# Altium PCB FIT_PM_Dual_Range_AFE.PcbDoc (part 10 of 17)
Units mm, origin at the board's own origin, x right, y up, seen from the top; angles counter-clockwise.
Board outline 259 x 114 mm, 8 copper layers (Top Layer, Mid-Layer 1, Mid-Layer 2, Layer 1, Layer 2, Mid-Layer 3, Mid-Layer 4, Bottom Layer), stack 1.616 mm thick; 963 components, 806 nets, 4757 pads, 2208 vias.
Unrouted connection lines stored in the file: 682.
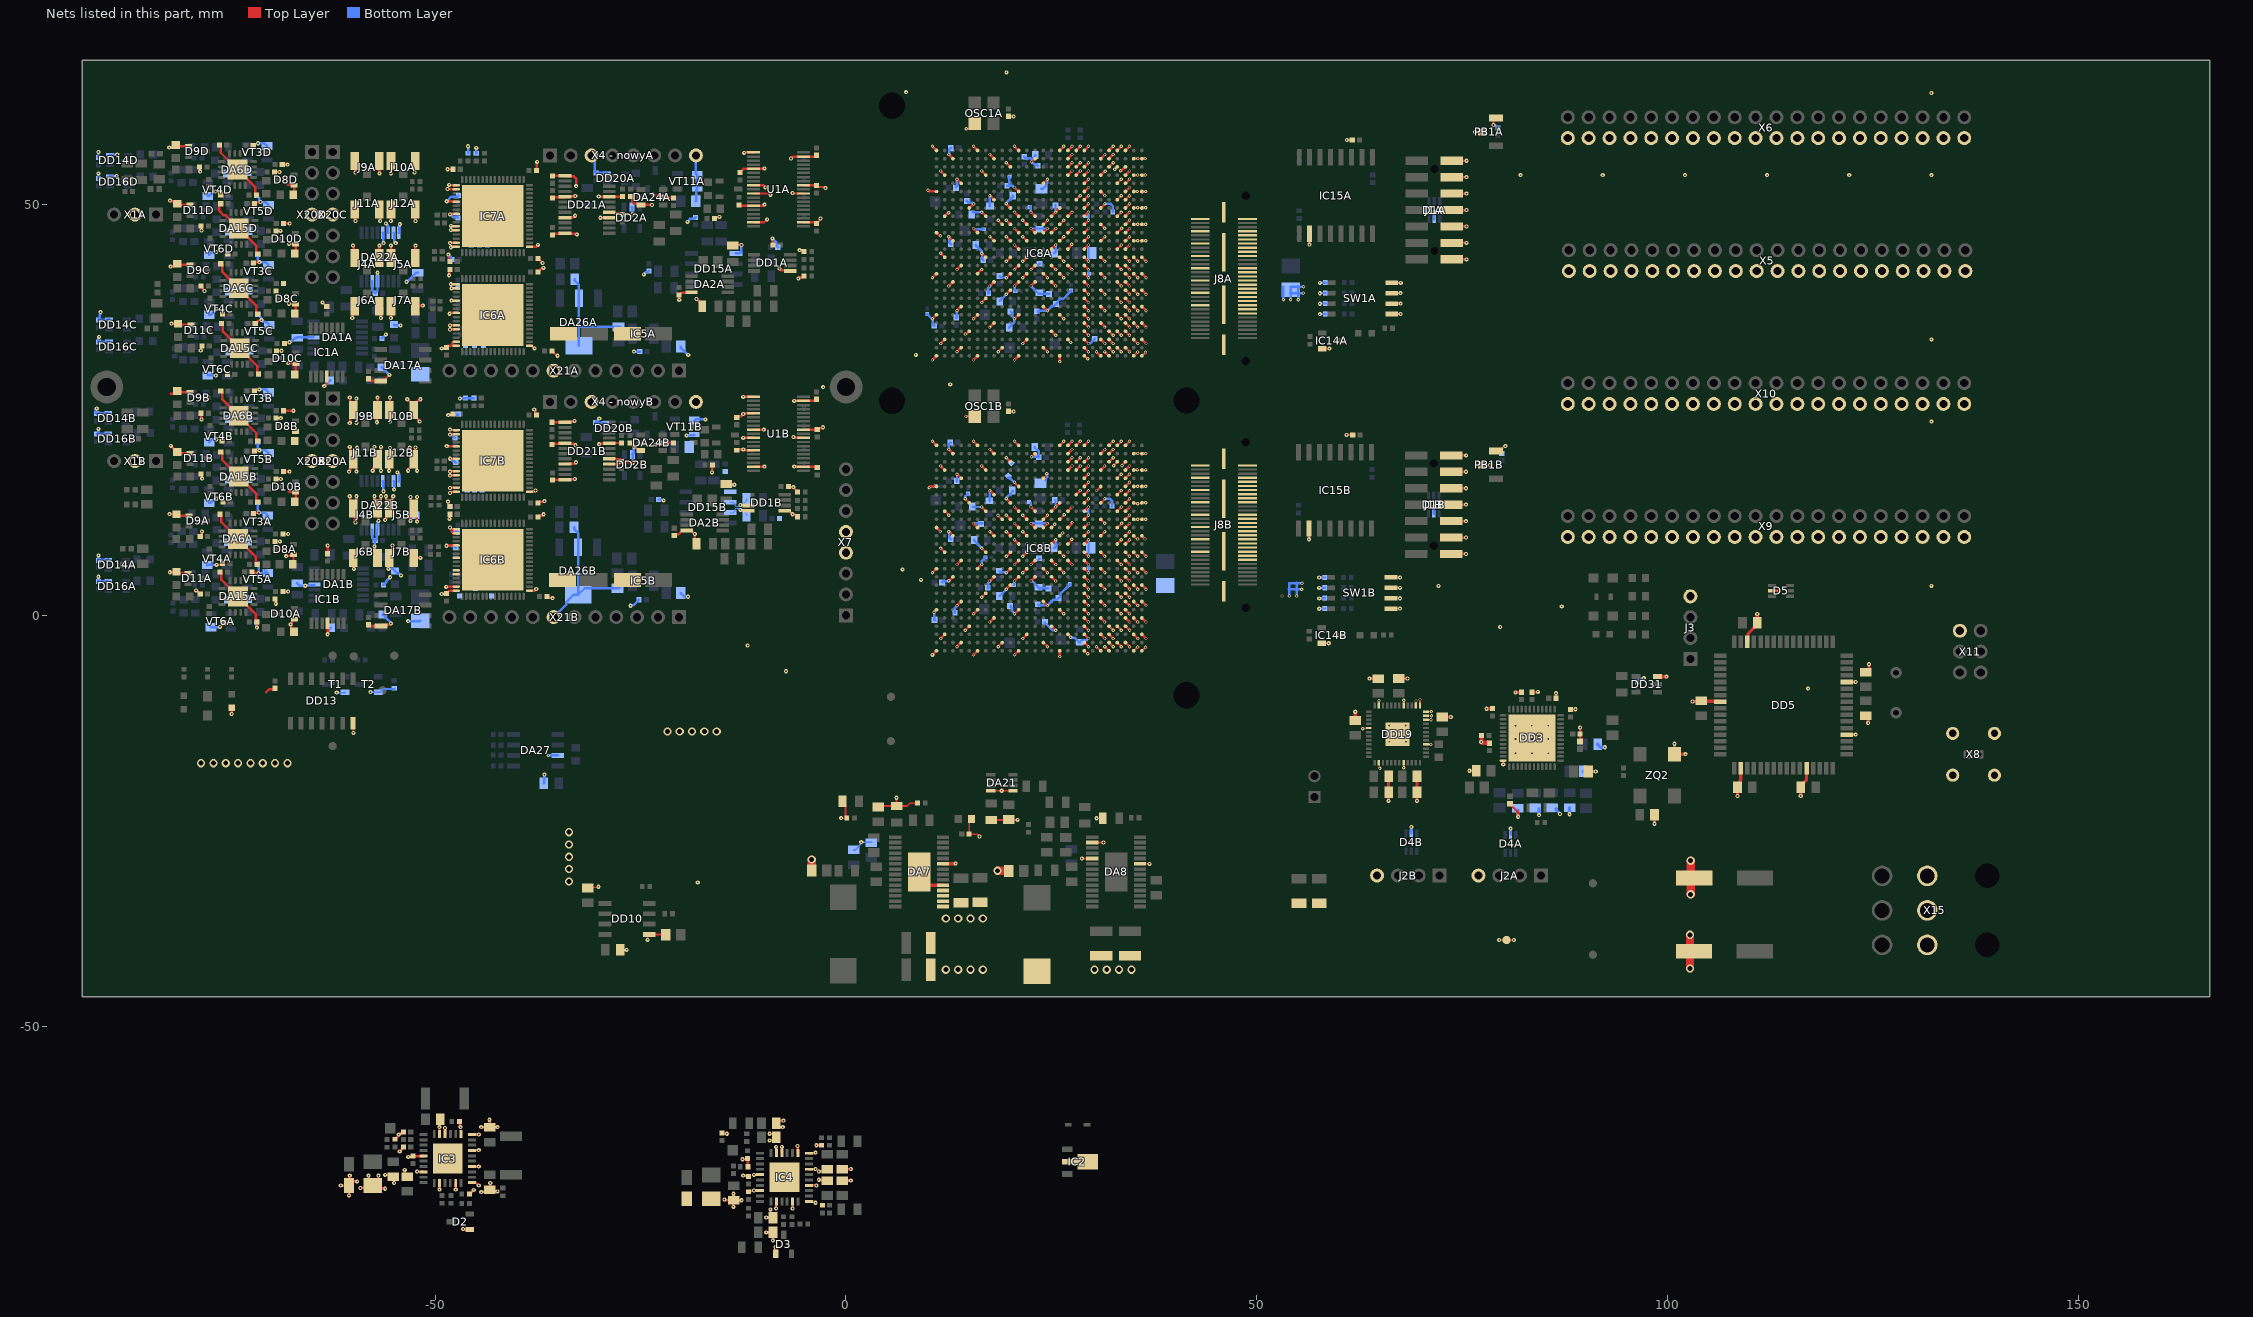
[diagram p12: the nets of this part, all layers, seen from the top]

## Via types
v1: diameter 0.5, hole 0.2, Top Layer to Bottom Layer, tented both sides, 1234 vias
v2: diameter 0.4, hole 0.2, Top Layer to Bottom Layer, tented both sides, 876 vias
v3: diameter 1, hole 0.6, Top Layer to Bottom Layer, tented both sides, 74 vias
v4: diameter 0.8, hole 0.4, Top Layer to Bottom Layer, tented both sides, 15 vias
v5: diameter 0.5, hole 0.2, Top Layer to Bottom Layer, 9 vias

## Nets (pads, with @x,y where several pads share a name; then routed paths per layer and width w, separated by ;. In a path a pad name is that pad's centre, name@x,y a point inside that pad or via, vN(x,y) a via of type N, cw(c..) or ccw(c..) an arc to the next point about the centre after c; other vN are vias at no path point) (continued)
Gate_STR1B_N: DD1B.3 DD15B.6 R117B.1 | length 3.9
  Top Layer w0.145: v1(-12.858,13.435) -11.913,13.435 DD1B.3@-11.858,13.381
  Bottom Layer w0.145: DD15B.6@-14.1,13.77 -13.705,13.77 -13.477,13.543 -13.477,13.342 -13.392,13.257 -13.1,13.257 -13.068,13.29 -12.945,13.29 -12.858,13.377 v1(-12.858,13.435) -12.762,13.435 -12.625,13.573 -12.502,13.573 -12.1,13.975 R117B.1@-12.1,14.2
Gate_STR1B_P: DD1B.4 DD15B.7 R10B.1 | length 3.9
  Top Layer w0.145: v1(-12.858,12.835) -11.963,12.835 DD1B.4@-11.858,12.731
  Bottom Layer w0.145: DD15B.7@-14.1,12.5 -13.705,12.5 -13.477,12.727 -13.477,12.928 -13.392,13.012 -13.1,13.012 -13.038,12.951 -12.974,12.951 v1(-12.858,12.835) -12.762,12.835 -12.655,12.728 -12.502,12.728 -12.1,12.325 R10B.1@-12.1,12.1
GND: "X4 - nowyA.3" "X4 - nowyA.8" "X4 - nowyB.3" "X4 - nowyB.8" B12.1 C2.2 C3A.1 C3B.1 C4.1 C8A.1 C8B.1 C9A.1 C9B.1 C10A.1 C10B.1 C11.1 C12.1 C13.2 C14.2 C15A.1 C15B.1 C16A.1 C16B.1 C17A.1 C17B.1 C18A.1 C18B.1 C19.1 C20.1 C21.1 C22.1 C23.1 C24.1 C25.1 C26.1 C29.1 C30.1 C31.1 C32.1 C33.1 C34.1 C35.1 C36A.1 C36B.1 C37A.1 C37B.1 C38A.1 C38B.1 C39A.1 C39B.1 C40.1 C41.1 C42.1 C43.1 C44.1 C45.2 C47.2 C48.1 C49.1 C50A.1 C50B.1 C54A.1 C54B.1 C55A.1 C55B.1 C56A.1 C56B.1 C58A.1 C58B.1 C59A.1 C59B.1 C60A.1 C60B.1 C61A.1 C61B.1 C62A.1 C62B.1 C63A.1 C63B.1 C63C.1 C63D.1 C64A.1 C64B.1 C64C.1 C64D.1 C65A.2 C65B.2 C67A.1 C67B.1 C68.1 C69.1 C70.1 C71.1 C72.1 C73.1 C74A.1 C74B.1 C74C.1 C74D.1 C75.1 C76.1 C77.1 C78A.1 C78B.1 C79A.1 C79B.1 C80A.1 C80B.1 C81A.1 C81B.1 C82A.1 C82B.1 C83A.1 C83B.1 C84A.1 C84B.1 C85A.1 C85B.1 C86.1 C87A.2 C87B.2 C88.1 C89A.1 C89B.1 C89C.1 C89D.1 C90A.1 C90B.1 C91A.1 C91B.1 C91C.1 C91D.1 C92A.1 C92B.1 C92C.1 C92D.1 C93A.1 C93B.1 C93C.1 C93D.1 C94A.1 C94B.1 C95A.1 C95B.1 C96A.1 C96B.1 C97A.1 C97B.1 C98A.1 C98B.1 C99A.1 C99B.1 C100A.1 C100B.1 C101A.1 C101B.1 C102A.1 C102B.1 C102C.1 C102D.1 C103A.2 C103B.2 C104A.1 C104B.1 C105.1 C106.1 C107.1 C108.1 C109.1 C110A.1 C110B.1 C111A.1 C111B.1 C112A.1 C112B.1 C113A.1 C113B.1 C114.1 C115.1 C116A.1 C116B.1 C117A.1 C117B.1 C118.1 C122.1 C124.1 C125A.1 C125B.1 C125C.1 C125D.1 C126A.1 C126B.1 C126C.1 C126D.1 C129A.1 C129B.1 C129C.1 C129D.1 C131A.1 C131B.1 C132.1 C133.2 C134.1 C135.1 C137.1 C138A.1 C138B.1 C138C.1 C138D.1 C140A.1 C140B.1 C140C.1 C140D.1 C142.1 C144A.1 C144B.1 C145.1 C146.1 C147A.1 C147B.1 C152A.1 C152B.1 C153A.1 C153B.1 C153C.1 C153D.1 C154A.1 C154B.1 C154C.1 C154D.1 C155A.1 C155B.1 C155C.1 C155D.1 C156A.1 C156B.1 C156C.1 C156D.1 C157A.1 C157B.1 C158A.1 C158B.1 C159A.1 C159B.1 C160A.1 C160B.1 C161A.1 C161B.1 C162A.1 C162B.1 C163A.2 C163B.2 C164A.1 C164B.1 C165A.1 C165B.1 C166A.1 C166B.1 C167A.1 C167B.1 C192.2 C193A.1 C193B.1 C194.1 C195.1 C196A.1 C196B.1 C197A.1 C197B.1 C198A.1 C198B.1 C199.1 C200A.1 C200B.1 C201.1 C208A.1 C208B.1 C211A.1 C211B.1 C212.1 C213.1 C214A.1 C214B.1 C215A.1 C215B.1 C216A.1 C216B.1 C217.1 C218.1 C219.1 C220.1 C221A.1 C221B.1 C222A.1 C222B.1 C223.1 C224.1 C225A.1 C225B.1 C226A.1 C226B.1 C227A.1 C227B.1 C228A.1 C228B.1 C229A.1 C229B.1 C230A.1 C230B.1 C231A.1 C231B.1 C232A.1 C232B.1 C255.1 C256.1 C257.1 C258.1 C259.1 C286A.1 C286B.1 C286C.1 C286D.1 C287A.1 C287B.1 C287C.1 C287D.1 C288A.1 C288B.1 C288C.1 C288D.1 C291A.1 C291B.1 C291C.1 C291D.1 C294A.1 C294B.1 C294C.1 C294D.1 C305A.1 C305B.1 C305C.1 C305D.1 C306A.1 C306B.1 C306C.1 C306D.1 C309A.1 C309B.1 C309C.1 C309D.1 C310A.1 C310B.1 C310C.1 C310D.1 C313A.1 C313B.1 C319A.1 C319B.1 C320A.1 C320B.1 D1A.2 D1B.2 D2.1 D3.1 D4A.2 D4B.2 D5.2 D8A.1 D8B.1 D8C.1 D8D.1 D9A.1 D9B.1 D9C.1 D9D.1 D10A.1 D10B.1 D10C.1 D10D.1 D11A.1 D11B.1 D11C.1 D11D.1 DA1A.11 DA1B.11 DA2A.8 DA2B.8 DA6A.17 DA6B.17 DA6C.17 DA6D.17 DA7.1 DA7.2 DA7.3 DA7.4 DA7.5 DA7.9 DA7.29 DA8.9 DA8.16 DA8.19 DA15A.17 DA15B.17 DA15C.17 DA15D.17 DA17A.4 DA17B.4 DA21.4 DA21.5 DA22A.5 DA22A.6 DA22A.13 DA22A.14 DA22A.15 DA22A.16 DA22B.5 DA22B.6 DA22B.13 DA22B.15 DA22B.16 DA24A.2 DA24A.6 DA24B.2 DA24B.6 DA26A.2 DA26A.4 DA26B.2 DA26B.4 DA27.7 DD1A.5 DD1B.5 DD2A.2 DD2B.2 DD3.36 DD3.49 DD5.14 DD5.24 DD5.34 DD5.44 DD5.52 DD5.60 DD10.1 DD13.7 DD14A.3 DD14B.3 DD14C.3 DD14D.3 DD15A.5 DD15B.5 DD16A.3 DD16B.3 DD16C.3 DD16D.3 DD19.4 DD19.10 DD19.11 DD19.12 DD19.13 DD19.14 DD19.17 DD19.23 DD19.29 DD19.38 DD19.44 DD19.49 DD20A.3 DD20B.3 DD21A.4 DD21A.5 DD21A.8 DD21A.13 DD21A.17 DD21A.21 DD21A.24 DD21B.4 DD21B.5 DD21B.8 DD21B.13 DD21B.17 DD21B.21 DD21B.24 DD31.3 IC1A.11 IC1B.11 IC2.2 IC3.2 IC3.5 IC3.7 IC3.10 IC3.13 IC3.16 IC3.17 IC3.20 IC3.21 IC3.27 IC3.30 IC3.33 IC4.2 IC4.5 IC4.7 IC4.10 IC4.13 IC4.16 IC4.17 IC4.20 IC4.21 IC4.27 IC4.30 IC4.33 IC5A.2 IC5B.2 IC6A.17 IC6A.18 IC6A.21 IC6A.24 IC6A.27 IC6A.28 IC6A.31 IC6A.32 IC6A.49 IC6A.65 IC6B.17 IC6B.18 IC6B.21 IC6B.24 IC6B.27 IC6B.28 IC6B.31 IC6B.32 IC6B.49 IC6B.65 IC7A.17 IC7A.18 IC7A.21 IC7A.24 IC7A.27 IC7A.28 IC7A.31 IC7A.32 IC7A.49 IC7A.65 IC7B.17 IC7B.18 IC7B.21 IC7B.24 IC7B.27 IC7B.28 IC7B.31 IC7B.32 IC7B.49 IC7B.65 IC8A.A1 IC8A.A2 IC8A.A5 IC8A.A6 IC8A.A8 IC8A.A11 IC8A.A16 IC8A.A21 IC8A.A26 IC8A.AA1 IC8A.AA2 IC8A.AA3 IC8A.AA6 IC8A.AA8 IC8A.AA16 IC8A.AA26 IC8A.AB3 IC8A.AB4 IC8A.AB8 IC8A.AB13 IC8A.AB23 IC8A.AC1 IC8A.AC2 IC8A.AC3 IC8A.AC6 IC8A.AC8 IC8A.AC9 IC8A.AC10 IC8A.AC20 IC8A.AC25 IC8A.AD3 IC8A.AD4 IC8A.AD5 IC8A.AD8 IC8A.AD9 IC8A.AD10 IC8A.AD17 IC8A.AE1 IC8A.AE2 IC8A.AE5 IC8A.AE6 IC8A.AE10 IC8A.AE14 IC8A.AE19 IC8A.AE24 IC8A.AF3 IC8A.AF4 IC8A.AF5 IC8A.AF8 IC8A.AF9 IC8A.AF10 IC8A.AF11 IC8A.AF16 IC8A.AF21 IC8A.AF26 IC8A.B3 IC8A.B4 IC8A.B5 IC8A.B8 IC8A.B13 IC8A.B18 IC8A.B23 IC8A.C1 IC8A.C2 IC8A.C5 IC8A.C6 IC8A.C8 IC8A.C10 IC8A.C15 IC8A.C25 IC8A.D3 IC8A.D4 IC8A.D5 IC8A.D8 IC8A.D12 IC8A.D22 IC8A.E1 IC8A.E2 IC8A.E3 IC8A.E6 IC8A.E8 IC8A.E19 IC8A.F3 IC8A.F4 IC8A.F8 IC8A.F11 IC8A.F16 IC8A.F21 IC8A.F26 IC8A.G1 IC8A.G2 IC8A.G3 IC8A.G6 IC8A.G8 IC8A.G13 IC8A.G23 IC8A.H3 IC8A.H4 IC8A.H8 IC8A.H20 IC8A.J1 IC8A.J2 IC8A.J3 IC8A.J6 IC8A.J8 IC8A.J17 IC8A.K3 IC8A.K4 IC8A.K8 IC8A.K12 IC8A.K14 IC8A.K16 IC8A.K19 IC8A.K24 IC8A.L1 IC8A.L2 IC8A.L3 IC8A.L6 IC8A.L8 IC8A.L11 IC8A.L13 IC8A.L15 IC8A.L17 IC8A.L21 IC8A.L26 IC8A.M3 IC8A.M4 IC8A.M8 IC8A.M10 IC8A.M12 IC8A.M14 IC8A.M16 IC8A.M23 IC8A.N1 IC8A.N2 IC8A.N3 IC8A.N6 IC8A.N8 IC8A.N11 IC8A.N15 IC8A.N17 IC8A.N20 IC8A.N25 IC8A.P3 IC8A.P4 IC8A.P8 IC8A.P10 IC8A.P12 IC8A.P16 IC8A.R1 IC8A.R2 IC8A.R3 IC8A.R6 IC8A.R8 IC8A.R11 IC8A.R15 IC8A.R17 IC8A.R19 IC8A.R24 IC8A.T3 IC8A.T4 IC8A.T8 IC8A.T10 IC8A.T12 IC8A.T13 IC8A.T14 IC8A.T16 IC8A.T21 IC8A.T26 IC8A.U1 IC8A.U2 IC8A.U3 IC8A.U6 IC8A.U8 IC8A.U11 IC8A.U13 IC8A.U15 IC8A.U17 IC8A.U18 IC8A.V3 IC8A.V4 IC8A.V8 IC8A.V10 IC8A.V12 IC8A.V14 IC8A.V16 IC8A.V20 IC8A.V25 IC8A.W1 IC8A.W2 IC8A.W3 IC8A.W6 IC8A.W8 IC8A.W11 IC8A.W17 IC8A.W22 IC8A.Y3 IC8A.Y4 IC8A.Y8 IC8A.Y9 IC8A.Y19 IC8B.A1 IC8B.A2 IC8B.A5 IC8B.A6 IC8B.A8 IC8B.A11 IC8B.A16 IC8B.A21 IC8B.A26 IC8B.AA1 IC8B.AA2 IC8B.AA3 IC8B.AA6 IC8B.AA8 IC8B.AA16 IC8B.AA26 IC8B.AB3 IC8B.AB4 IC8B.AB8 IC8B.AB13 IC8B.AB23 IC8B.AC1 IC8B.AC2 IC8B.AC3 IC8B.AC6 IC8B.AC8 IC8B.AC9 IC8B.AC10 IC8B.AC20 IC8B.AC25 IC8B.AD3 IC8B.AD4 IC8B.AD5 IC8B.AD8 IC8B.AD9 IC8B.AD10 IC8B.AD17 IC8B.AE1 IC8B.AE2 IC8B.AE5 IC8B.AE6 IC8B.AE10 IC8B.AE14 IC8B.AE19 IC8B.AE24 IC8B.AF3 IC8B.AF4 IC8B.AF5 IC8B.AF8 IC8B.AF9 IC8B.AF10 IC8B.AF11 IC8B.AF16 IC8B.AF21 IC8B.AF26 IC8B.B3 IC8B.B4 IC8B.B5 IC8B.B8 IC8B.B13 IC8B.B18 IC8B.B23 IC8B.C1 IC8B.C2 IC8B.C5 IC8B.C6 IC8B.C8 IC8B.C10 IC8B.C15 IC8B.C25 IC8B.D3 IC8B.D4 IC8B.D5 IC8B.D8 IC8B.D12 IC8B.D22 IC8B.E1 IC8B.E2 IC8B.E3 IC8B.E6 IC8B.E8 IC8B.E19 IC8B.F3 IC8B.F4 IC8B.F8 IC8B.F11 IC8B.F16 IC8B.F21 IC8B.F26 IC8B.G1 IC8B.G2 IC8B.G3 IC8B.G6 IC8B.G8 IC8B.G13 IC8B.G23 IC8B.H3 IC8B.H4 IC8B.H8 IC8B.H20 IC8B.J1 IC8B.J2 IC8B.J3 IC8B.J6 IC8B.J8 IC8B.J17 IC8B.K3 IC8B.K4 IC8B.K8 IC8B.K12 IC8B.K14 IC8B.K16 IC8B.K19 IC8B.K24 IC8B.L1 IC8B.L2 IC8B.L3 IC8B.L6 IC8B.L8 IC8B.L11 IC8B.L13 IC8B.L15 IC8B.L17 IC8B.L21 IC8B.L26 IC8B.M3 IC8B.M4 IC8B.M8 IC8B.M10 IC8B.M12 IC8B.M14 IC8B.M16 IC8B.M23 IC8B.N1 IC8B.N2 IC8B.N3 IC8B.N6 IC8B.N8 IC8B.N11 IC8B.N15 IC8B.N17 IC8B.N20 IC8B.N25 IC8B.P3 IC8B.P4 IC8B.P8 IC8B.P10 IC8B.P12 IC8B.P16 IC8B.R1 IC8B.R2 IC8B.R3 IC8B.R6 IC8B.R8 IC8B.R11 IC8B.R15 IC8B.R17 IC8B.R19 IC8B.R24 IC8B.T3 IC8B.T4 IC8B.T8 IC8B.T10 IC8B.T12 IC8B.T13 IC8B.T14 IC8B.T16 IC8B.T21 IC8B.T26 IC8B.U1 IC8B.U2 IC8B.U3 IC8B.U6 IC8B.U8 IC8B.U11 IC8B.U13 IC8B.U15 IC8B.U17 IC8B.U18 IC8B.V3 IC8B.V4 IC8B.V8 IC8B.V10 IC8B.V12 IC8B.V14 IC8B.V16 IC8B.V20 IC8B.V25 IC8B.W1 IC8B.W2 IC8B.W3 IC8B.W6 IC8B.W8 IC8B.W11 IC8B.W17 IC8B.W22 IC8B.Y3 IC8B.Y4 IC8B.Y8 IC8B.Y9 IC8B.Y19 IC14A.2 IC14B.2 IC15A.10 IC15B.10 J1A.1 J1A.3 J1A.5 J1A.7 J1A.9 J1A.11 J1A.13 J1B.1 J1B.3 J1B.5 J1B.7 J1B.9 J1B.11 J1B.13 J2A.4 J2B.4 J3.4 J4A.2 J4B.2 J5A.2 J5B.2 J6A.2 J6B.2 J7A.2 J7B.2 J8A.1 J8A.2 J8A.7 J8A.8 J8A.10 J8A.12 J8A.13 J8A.14 J8A.16 J8A.18 J8A.19 J8A.20 J8A.25 J8A.26 J8A.28 J8A.30 J8A.31 J8A.32 J8A.34 J8A.36 J8A.37 J8A.38 J8A.40 J8A.42 J8A.43 J8A.44 J8A.46 J8A.48 J8A.61 J8A.62 J8A.63 J8A.64 J8B.1 J8B.2 J8B.7 J8B.8 J8B.10 J8B.12 J8B.13 J8B.14 J8B.16 J8B.18 J8B.19 J8B.20 J8B.25 J8B.26 J8B.28 J8B.30 J8B.31 J8B.32 J8B.34 J8B.36 J8B.37 J8B.38 J8B.40 J8B.42 J8B.43 J8B.44 J8B.46 J8B.48 J8B.61 J8B.62 J8B.63 J8B.64 J9A.2 J9B.2 J10A.2 J10B.2 J11A.2 J11B.2 J12A.2 J12B.2 L8A.2 L8B.2 L10.2 LD1.1 OSC1A.2 OSC1B.2 PB1A.1 PB1A.3 PB1B.1 PB1B.3 R2A.1 R2B.1 R8A.1 R8B.1 R14A.1 R14B.1 R15A.1 R15B.1 R24A.1 R24B.1 R26A.1 R26B.1 R28.1 R30A.1 R30B.1 R32A.1 R32B.1 R43.1 R45.1 R46A.1 R46B.1 R48.1 R51A.1 R51B.1 R53A.1 R53B.1 R55A.1 R55B.1 R58.1 R61.1 R62.1 R63.1 R64.1 R65.1 R71.1 R75A.1 R75B.1 R77A.1 R77B.1 R86.1 R90.1 R91.1 R94.1 R97.1 R98.1 R105A.1 R105B.1 R111.1 R118A.1 R118B.1 R122xA.1 R122xB.1 R152A.1 R152B.1 R153A.1 R153B.1 R154A.1 R154B.1 R155A.1 R155B.1 R248A.1 R248B.1 SW1A.1 SW1A.2 SW1A.3 SW1A.4 SW1B.1 SW1B.2 SW1B.3 SW1B.4 T1.2 T2.2 U1A.1 U1A.5 U1A.9 U1A.11 U1A.14 U1A.18 U1A.21 U1A.28 U1A.30 U1A.37 U1B.1 U1B.5 U1B.9 U1B.11 U1B.14 U1B.18 U1B.21 U1B.28 U1B.30 U1B.37 VT3A.1 VT3B.1 VT3C.1 VT3D.1 VT4A.1 VT4B.1 VT4C.1 VT4D.1 VT5A.1 VT5B.1 VT5C.1 VT5D.1 VT6A.1 VT6B.1 VT6C.1 VT6D.1 VT11A.1 VT11A.2 VT11B.1 VT11B.2 X1A.2 X1B.2 X5.2 X5.4 X5.6 X5.8 X5.10 X5.12 X5.14 X5.16 X5.18 X5.20 X5.22 X5.24 X5.26 X5.28 X5.30 X5.32 X5.34 X5.36 X5.38 X5.40 X6.2 X6.4 X6.6 X6.8 X6.10 X6.12 X6.14 X6.16 X6.18 X6.20 X6.22 X6.24 X6.26 X6.28 X6.30 X6.32 X6.34 X6.36 X6.38 X6.40 X7.4 X7.5 X8.3 X9.2 X9.4 X9.6 X9.8 X9.10 X9.12 X9.14 X9.16 X9.18 X9.20 X9.22 X9.24 X9.26 X9.28 X9.30 X9.32 X9.34 X9.36 X9.38 X9.40 X10.2 X10.4 X10.6 X10.8 X10.10 X10.12 X10.14 X10.16 X10.18 X10.20 X10.22 X10.24 X10.26 X10.28 X10.30 X10.32 X10.34 X10.36 X10.38 X10.40 X11.6 X15.1 X15.2 X15.3 X20A.4 X20B.4 X20C.4 X20D.4 X21A.7 X21B.7 ZQ2.2 | length 1150.8
  Top Layer w0.15: DD13.7@-59.987,-13.124 -59.948,-13.164 v1(-59.948,-14.308) ; C195.1@-31.541,-33.086 -30.186,-33.086 v1(-30.141,-33.041) ; v1(30.508,-24.694) 30.858,-24.694 R71.1@31.258,-24.682
  Top Layer w0.2: C194.1@-27.497,-40.724 -27.492,-40.719 v1(-26.697,-40.719) ; v1(-24.141,-39.506) -24.141,-38.851 -22.051,-38.851 C12.1@-22.041,-38.841 ; v1(-0.59,-24.684) -0.58,-24.694 0.064,-24.694 R63.1@0.091,-24.667 ; R62.1@-0.43,-22.623 -0.43,-22.848 -0.057,-23.221 -0.057,-24.519 R63.1@0.058,-24.634 ; C134.1@3.954,-23.199 R65.1@6.154,-23.199 ; v1(6.154,-22.199) R65.1@6.154,-23.199 ; R64.1@8.742,-22.868 7.791,-22.868 7.461,-23.199 R65.1@6.154,-23.199 ; v2(14.638,59.244) 15.549,59.244 OSC1A.2@15.665,59.36 ; R61.1@15.275,-24.777 14.999,-25.054 14.999,-26.644 15.979,-26.644 v1(16.256,-26.921) ; R111.1@17.691,-24.906 19.807,-24.906 19.816,-24.896 v1(20.891,-24.896) ; DA21.4@17.741,-21.356 v1(18.966,-21.356) DA21.5@20.191,-21.356 ; C78B.1@19.802,24.845 19.829,24.819 v1(20.409,24.819) ; C78A.1@19.802,60.745 19.829,60.719 v1(20.409,60.719) ; v1@28.644,-29.599 v1(28.709,-29.599) DA8.19@29.994,-29.599 DA8.19@30.144,-29.599 ; DA8.16@30.144,-27.649 v1(31.344,-27.649) v1@31.244,-27.549 ; DA8.9@35.644,-30.249 DA8.9@35.794,-30.249 v1(36.944,-30.249) ; v1(56.34,9.258) 56.34,10.543 IC15B.10@56.369,10.572 ; v1(56.415,45.121) 56.415,46.407 IC15A.10@56.444,46.436 ; IC14B.2@57.893,-3.402 57.895,-3.4 v1(58.76,-3.4) ; IC14A.2@57.968,32.462 57.97,32.464 v1(58.835,32.464) ; v2(62.898,-13.805) 62.952,-13.805 62.993,-13.764 63.605,-13.764 DD19.29@63.632,-13.738 ; DD19.23@64.875,-11.039 v2(64.875,-10.385) ; DD19.38@64.882,-17.929 64.919,-17.966 64.919,-18.491 64.992,-18.563 v2(64.992,-18.617) ; SW1B.1@66.337,0.825 SW1B.1@66.344,0.817 67.432,0.817 v1(67.439,0.81) ; SW1B.2@66.337,2.095 SW1B.2@66.344,2.087 67.432,2.087 v1(67.439,2.08) ; SW1B.3@66.337,3.365 SW1B.3@66.344,3.357 67.432,3.357 v1(67.439,3.35) ; SW1B.4@66.344,4.627 66.352,4.62 67.439,4.62 v1(67.447,4.612) ; SW1A.1@66.412,36.688 SW1A.1@66.419,36.681 67.507,36.681 v1(67.514,36.673) ; SW1A.2@66.412,37.958 SW1A.2@66.419,37.951 67.507,37.951 v1(67.514,37.943) ; SW1A.3@66.412,39.228 SW1A.3@66.419,39.221 67.507,39.221 v1(67.514,39.213) ; SW1A.4@66.419,40.491 66.427,40.483 67.514,40.483 v1(67.522,40.476) ; v2(67.884,-18.556) DD19.44@67.884,-17.901 ; DD19.17@67.886,-10.998 v2(67.886,-10.343) ; DD19.14@69.377,-11.076 v2(69.377,-10.421) ; DD19.13@69.864,-10.892 v2(69.864,-10.238) ; DD19.4@70.531,-15.728 v2(71.185,-15.728) ; DD19.10@70.599,-12.714 v2(71.202,-12.714) ; DD19.11@70.599,-12.214 v2(71.259,-12.214) ; DD19.12@70.599,-11.714 v2(71.254,-11.714) ; v1(79.503,-39.524) B12.1@80.403,-39.524 v1(81.303,-39.524)